# Altium PCB PCB_Design.PcbDoc
Units mil, origin at the board's own origin, x right, y up, seen from the top; angles counter-clockwise.
Board outline 2600 x 1820 mil, 2 copper layers (Top Layer, Bottom Layer); 18 components, 7 nets, 39 pads, 0 vias.
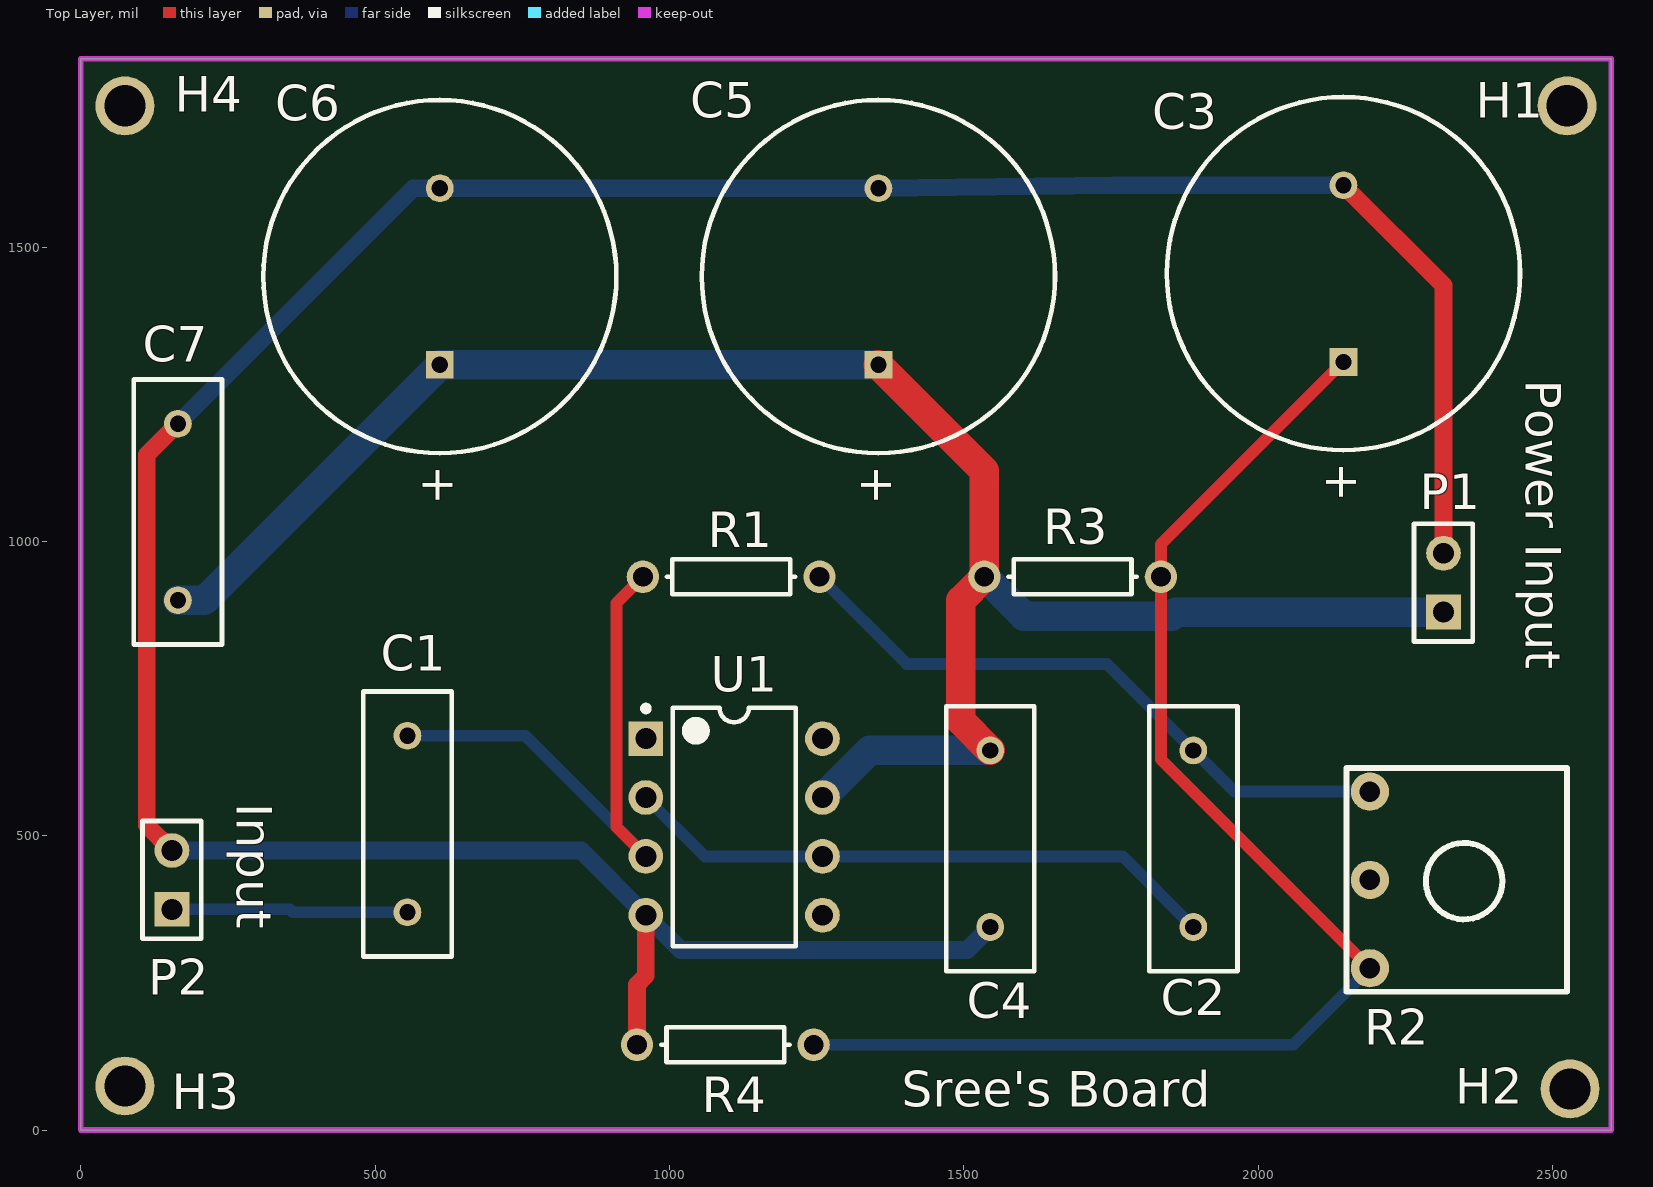
[diagram p0: Top Layer view]
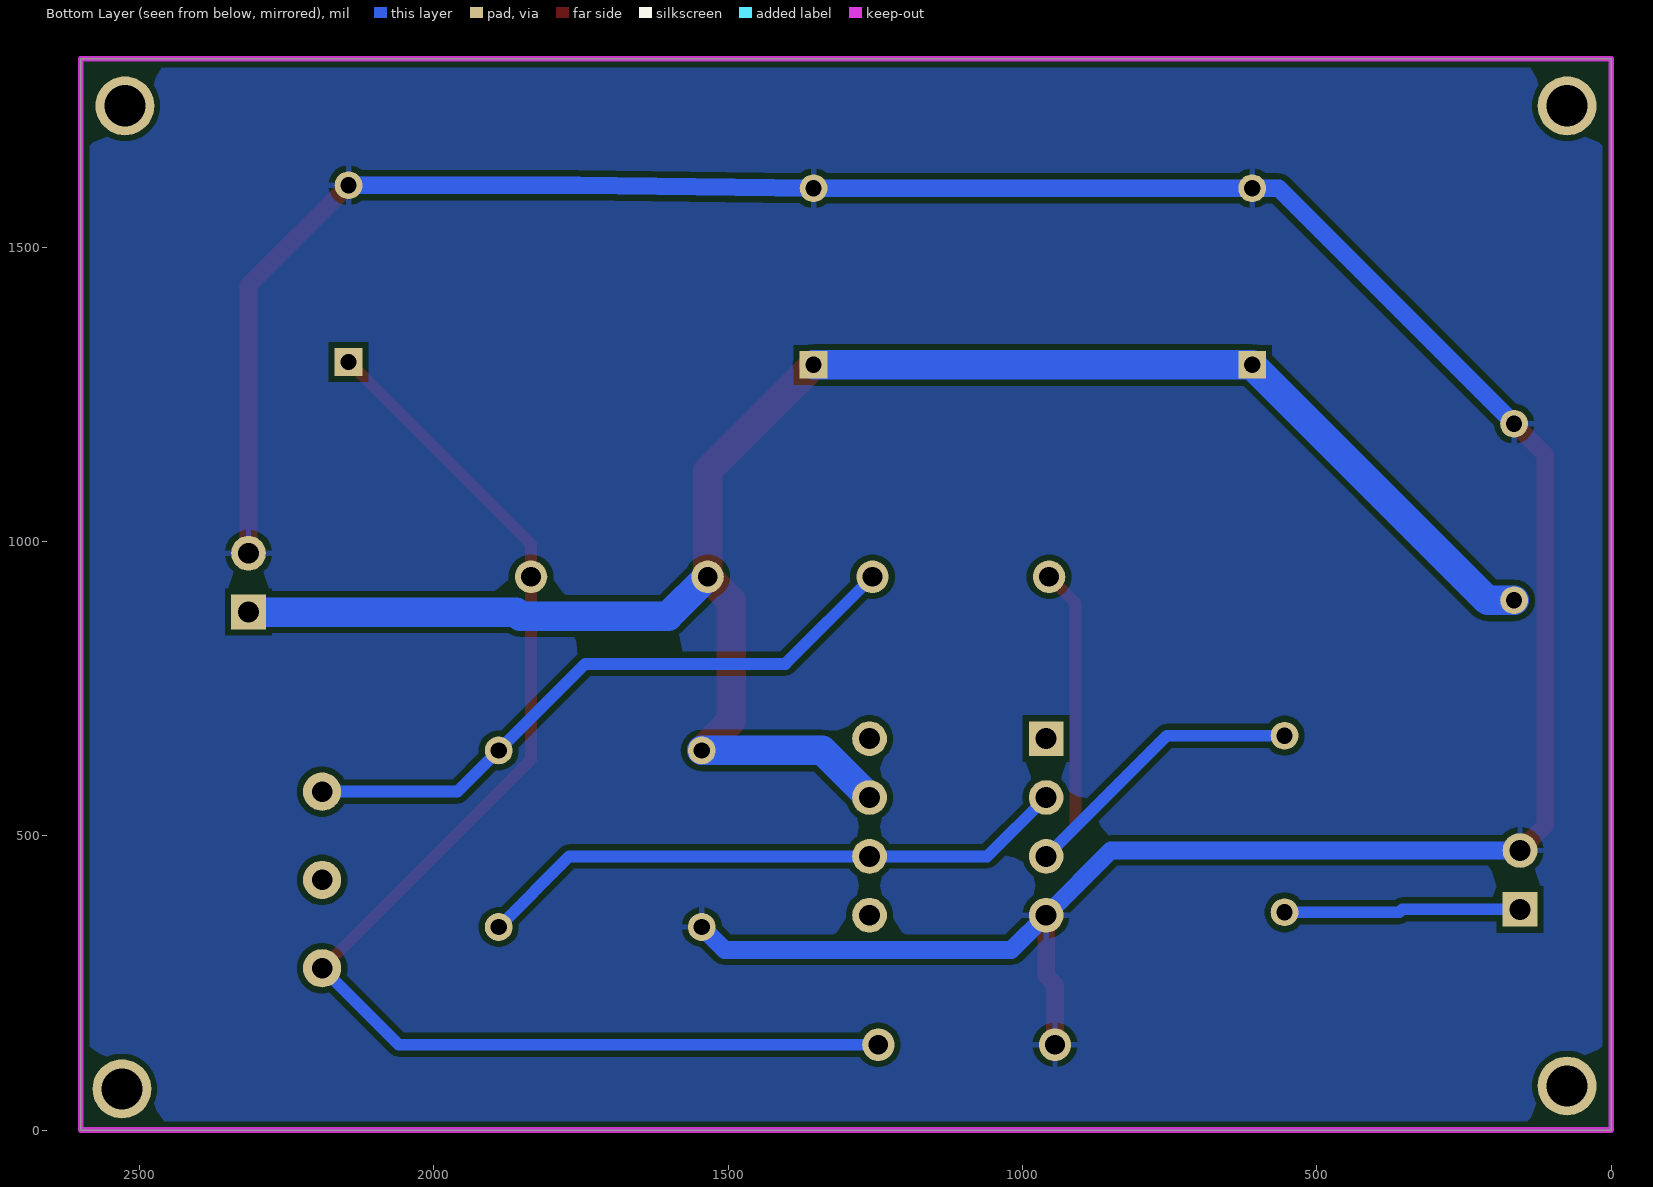
[diagram p1: Bottom Layer view, seen from below]

## Layer stack, top to bottom
Top Solder: solder mask 0.4, Solder Resist, Dk 3.5
Top Layer: signal copper 1.4
Dielectric 1: dielectric 12.6, FR-4, Dk 4.8
Bottom Layer: signal copper 1.4
Bottom Solder: solder mask 0.4, Solder Resist, Dk 3.5

## Board outline
0,0 0,1820 2600,1820 2600,0

## Design rules (kind name [scope] priority, off if disabled: settings)
Clearance [All] p1: gap=10 ignorepadtopadclearanceinfootprint=FALSE
PolygonConnect [All] p1: connectstyle=Relief reliefconductorwidth=10 reliefentries=4 polygonreliefangle="90 Angle" airgapwidth=10
RoutingVias [All] p1: holewidth=28 width=50 viastyle="Through Hole" minholewidth=28 minwidth=50 maxholewidth=28 maxwidth=50
SolderMaskExpansion [All] p1: expansion=4 istentingtop=FALSE
SupplyNets "Schematic Supply Nets_1" [InNet('GND')] p1: voltage=0.000
SupplyNets "Schematic Supply Nets" [InNet('+12VDC')] p2: voltage=0.000
Width "Schematic Width Constraint_1" [InNet('+12VDC')] p1: maxlimit=50 minlimit=50 preferedwidth=50
Width "Schematic Width Constraint" [InNet('GND')] p2: maxlimit=30 minlimit=30 preferedwidth=30
Width [All] p3: maxlimit=20 minlimit=20 preferedwidth=20
30 further rules are at their usual default settings.

## Components (designator, comment, footprint, x,y, rotation, side; value= is the part's Value field where it differs from the comment)
C1 "Cap" RAD-0.3 555,520 r90 top value=470pF
C2 "Cap" RAD-0.3 1890,495 r270 top value=1uF
C3 "Cap Pol1" RB7.6-15 2145,1455 r270 top value=100uF
C4 "Cap" RAD-0.3 1545,495 r270 top value=0.1uF
C5 "Cap Pol1" RB7.6-15 1355,1450 r270 top value=100uF
C6 "Cap Pol1" RB7.6-15 610,1450 r270 top value=100uF
C7 "Cap" RAD-0.3 165,1050 r270 top value=100nF
H1 "Hole 3mm" "Hole 3mm" 2915,1565 r0 top
H2 "Hole 3mm" "Hole 3mm" 2920,-105 r0 top
H3 "Hole 3mm" "Hole 3mm" 465,-100 r0 top
H4 "Hole 3mm" "Hole 3mm" 465,1565 r0 top
P1 "Power Input" HDR1X2 2315,880 r90 top
P2 "Input" HDR1X2 155,375 r90 top
R1 "Res1" AXIAL-0.3 1105,940 r180 top value=10K
R2 "RPot_1" "POT inline wide" 2190,525 r270 top value=50K
R3 "Res1" AXIAL-0.3 1685,940 r0 top value=1K
R4 "Res1" AXIAL-0.3 1095,145 r0 top value=1K
U1 "Op Amp" DIP-8 1110,515 r0 top

## Footprints (in the part's own frame and the unit in brackets; to place one, negate y for a bottom-side part, rotate by r counter-clockwise, add the part's x,y. Pads: shape width x height; smd on the part's side, far side on the other; paste and mask are expansions set on the pad)
AXIAL-0.3 [mm] "Axial Device, Thru-Hole; 2 Leads; 0.3 in Pin Spacing"
  round 1.4 hole 0.85: 1(-3.81,0) 2(3.81,0)
  silkscreen extent -2.77,-0.76 2.77,0.76
DIP-8 [mm]
  rect 1.5x1.5 hole 0.9: 1(-3.81,3.81)
  round 1.5 hole 0.9: 2(-3.81,1.27) 3(-3.81,-1.27) 4(-3.81,-3.81) 5(3.81,-3.81) 6(3.81,-1.27) 7(3.81,1.27) 8(3.81,3.81)
  silkscreen extent -3.93,-5.15 2.65,5.23, body extent -3.6,-5.15 3.6,5.15, height 5.08
HDR1X2 [mm] "Connector; Header; 2 Position"
  rect 1.5x1.5 hole 0.9: 1(0,0)
  round 1.5 hole 0.9: 2(2.54,0)
  silkscreen extent -1.27,-1.27 3.81,1.27
"Hole 3mm" [mil]
  round 100 hole 70: 1(-390,175)
"POT inline wide" [mil]
  round 65 hole 35: 1(-50,0) 2(100,0) 3(250,0)
  silkscreen extent -90,-40 290,335
RAD-0.3 [mm] "Radial Cap, Thru-Hole; 2 Leads; 0.3 in Pin Spacing"
  round 1.2 hole 0.7: 1(-3.81,0) 2(3.81,0)
  silkscreen extent -5.71,-1.91 5.71,1.91
RB7.6-15 [mm] "Polarized Capacitor (Radial); 2 Leads"
  rect 1.2x1.2 hole 0.7: 1(3.81,0)
  round 1.2 hole 0.7: 2(-3.81,0)
  silkscreen extent -7.62,-7.62 7.62,7.62

## Part data
C1 C2 C4 C7: "Capacitor", LatestRevisionDate=17-Jul-2002, LatestRevisionNote="Re-released for DXP Platform.", PackageDescription="Radial Cap, Thru-Hole; 2 Leads; 0.3 in Pin Spacing", PackageReference=RAD-0.3, Published=8-Jun-2000, Publisher="Altium Limited"
C3 C5 C6: "Polarized Capacitor (Radial)", LatestRevisionDate=17-Jul-2002, LatestRevisionNote="Re-released for DXP Platform.", PackageDescription="Polarized Capacitor (Radial); 2 Leads", PackageReference=RB7.6-15, Published=8-Jun-2000, Publisher="Altium Limited"
P1 P2: library part "Header 2", "Header, 2-Pin", LatestRevisionDate=17-Jul-2002, LatestRevisionNote="Re-released for DXP Platform.", Publisher="Altium Limited"
R1 R3 R4: "Resistor", LatestRevisionDate=17-Jul-2002, LatestRevisionNote="Re-released for DXP Platform.", PackageDescription="Axial Device, Thru-Hole; 2 Leads; 0.3 in Pin Spacing", PackageReference=AXIAL-0.3, Published=8-Jun-2000, Publisher="Altium Limited"
R2: library part RPot_3, "Potentiometer", LatestRevisionDate=17-Jul-2002, LatestRevisionNote="Re-released for DXP Platform.", PackageDescription="Variable Resistor, Thru-Hole; 3 Leads", PackageReference=VR5, Published=8-Jun-2000, Publisher="Altium Limited", Set Position=0.5, Sim Note="Enter the Resistance value and the set point into parameter fields."
U1: "FET Operational Amplifier", ComponentLink1Description="Manufacturer Link", ComponentLink1URL=http://www.analog.com/, DatasheetVersion="REV. B", LatestRevisionDate=17-Jul-2002, LatestRevisionNote="Re-released for DXP Platform.", PackageDescription="Can; 8 Leads; Pin Circle Dia. 5.08 mm; Lead Dia. 0.53 mm (max)", PackageReference=H-08A, PackageVersion=1990, Published=8-Jun-2000, Publisher="Altium Limited"

## Nets (pads, with @x,y where several pads share a name; then routed paths per layer and width w, separated by ;. In a path a pad name is that pad's centre, name@x,y a point inside that pad or via, vN(x,y) a via of type N, cw(c..) or ccw(c..) an arc to the next point about the centre after c; other vN are vias at no path point)
+12VDC: C4.1 C5.1 C6.1 C7.2 P1.1 R3.1 U1.7 | length 3251.3
  Top Layer w50: C5.1 1535,1120 R3.1 1495,900 1495,695 C4.1
  Bottom Layer w50: C7.2 210,900 C6.1 C5.1 ; U1.7 1340,645 C4.1 ; R3.1 1602,873 1853,873 1860,880 P1.1
GND: C3.2 C4.2 C5.2 C6.2 C7.1 P1.2 P2.2 R4.1 U1.4 | length 5308.3
  Top Layer w30: P2.2 112,518 112,1147 C7.1 ; R4.1 945,247 960,262 U1.4 ; C3.2 2315,1435 P1.2
  Bottom Layer w30: P2.2 850,475 U1.4 1019,306 1506,306 C4.2 ; C7.1 565,1600 C6.2 C5.2 1755,1605 C3.2
Input: C1.1 P2.1 | length 402.1
  Bottom Layer w20: P2.1 355,375 360,370 C1.1
NetC1_2: C1.2 R1.2 U1.3 | length 1004.3
  Top Layer w20: R1.2 910,895 910,515 U1.3
  Bottom Layer w20: C1.2 755,670 U1.3
NetC2_1: C2.1 R1.1 R2.1 | length 1086.2
  Bottom Layer w20: R1.1 1403,792 1743,792 C2.1 1960,575 R2.1
NetC3_1: C3.1 R2.3 R3.2 R4.2 | length 2304.3
  Top Layer w20: C3.1 1835,995 R3.2 1835,630 R2.3
  Bottom Layer w20: R4.2 2060,145 R2.3
Output: C2.2 U1.2 U1.6 | length 1021.1
  Bottom Layer w20: U1.2 1060,465 U1.6 1770,465 C2.2
pads on no net: H1.1 H2.1 H3.1 H4.1 R2.2 U1.1 U1.5 U1.8

## Polygon pours and split planes (outlines as drawn)
GND on Bottom Layer "GND_L02_P000" (solid, pour order 0): 0,0 0,1820 2600,1820 2600,0

## Keep-outs
Keep-Out Layer:
  the board outline again, w10

## Silkscreen, mask and mechanical layers (free items; w line width, h text height)
Top Overlay:
  text "Sree's Board" at 1395,40 h60

## Text inside footprints (layer, text, board x,y; h text height)
C3: Top Overlay "+" at 2115.99,1134.85 h59.06 r270
C5: Top Overlay "+" at 1325.99,1129.85 h59.06 r270
C6: Top Overlay "+" at 580.99,1129.85 h59.06 r270